# Altium PCB HIGROTERM1.PcbDoc
Units mil, origin at the board's own origin, x right, y up, seen from the top; angles counter-clockwise.
Board outline 6000 x 4000 mil, 2 copper layers (Top Layer, Bottom Layer); 30 components, 39 nets, 138 pads, 37 vias.
Unrouted connection lines stored in the file: 37.
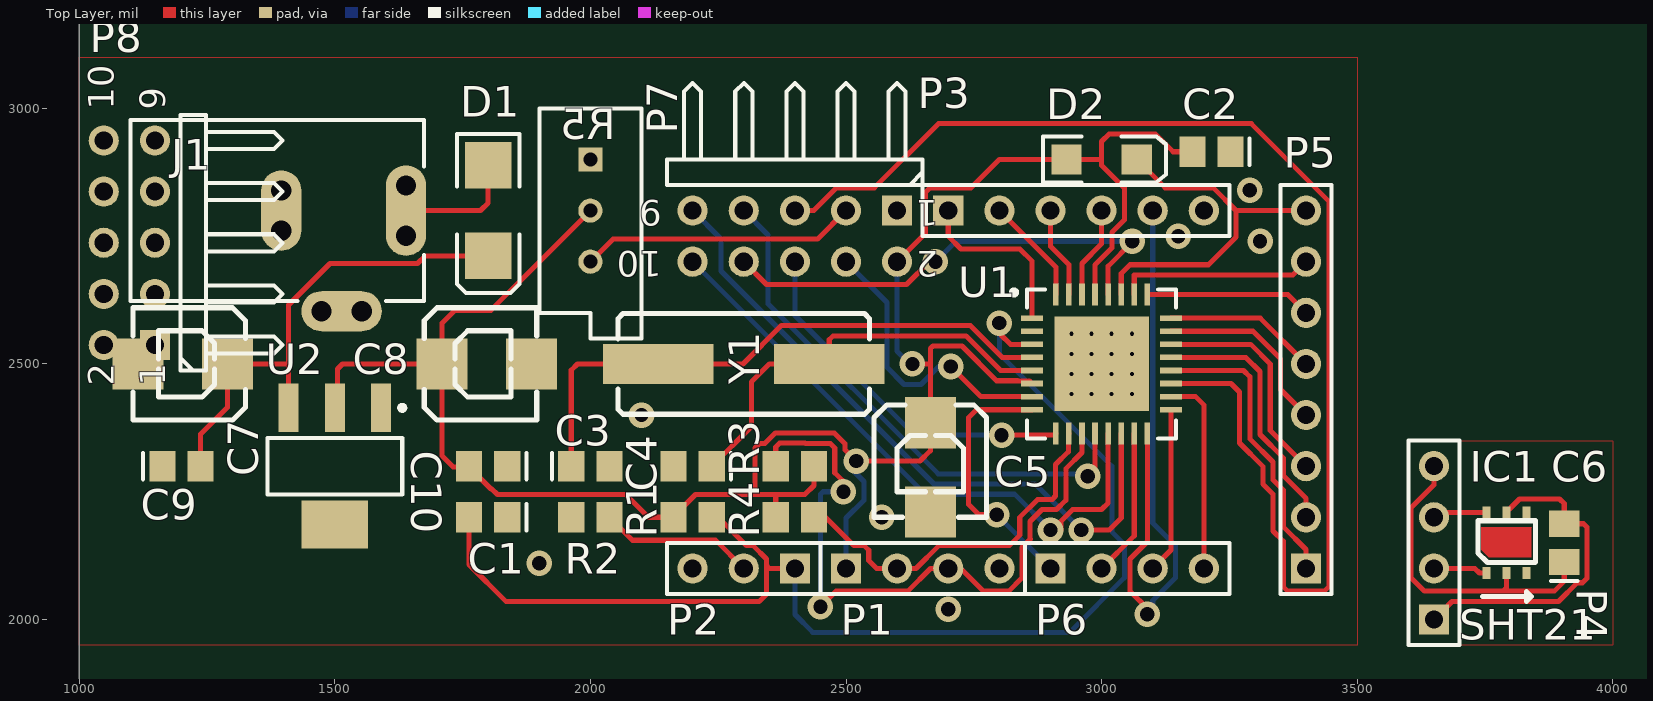
[diagram p0: Top Layer view]
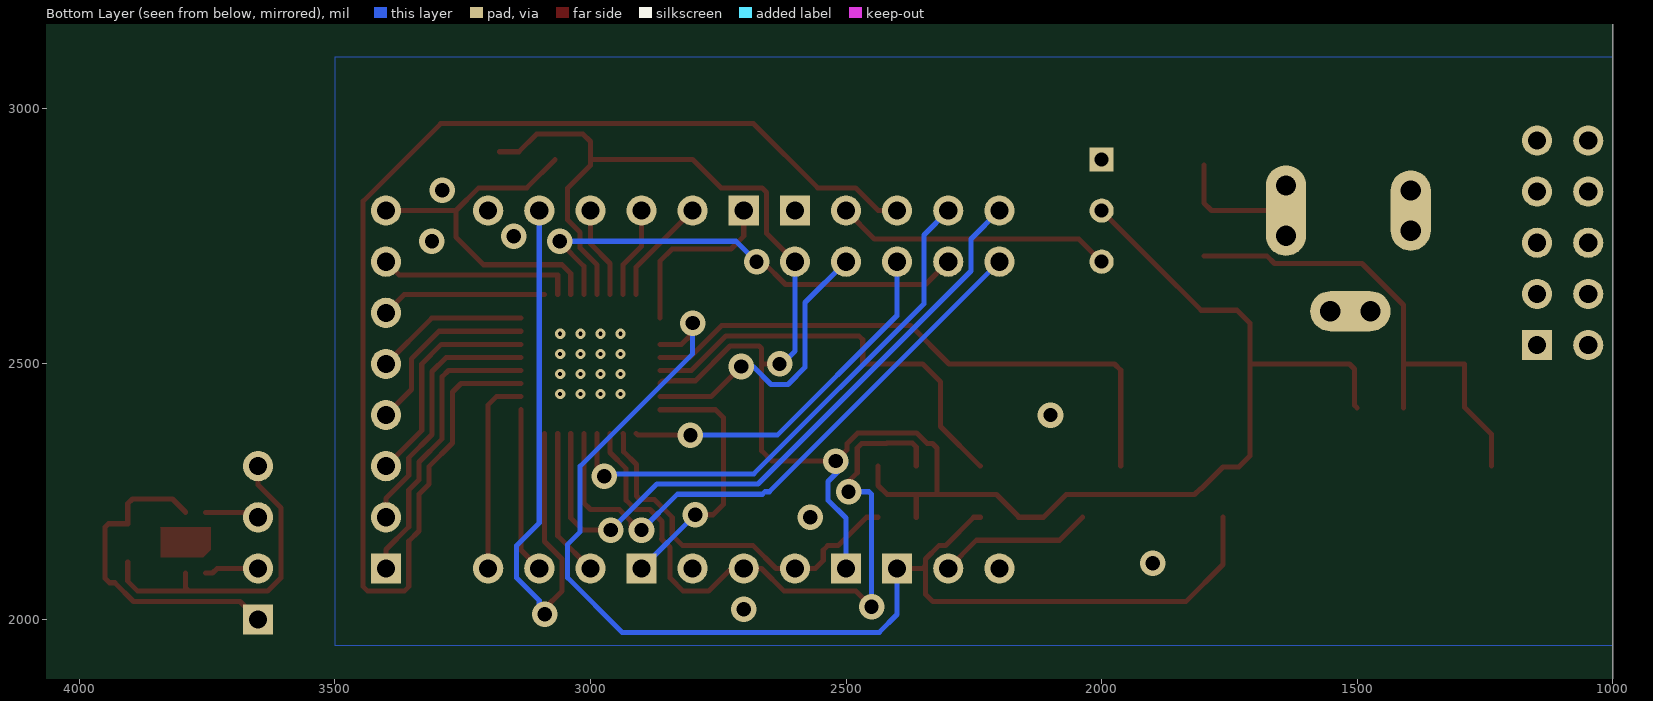
[diagram p1: Bottom Layer view, seen from below]

## Layer stack, top to bottom
Top Layer: signal copper 1.4
Dielectric: dielectric 12.6, FR-4, Dk 4.8
Bottom Layer: signal copper 1.4

## Board outline
1000,1000 7000,1000 7000,5000 1000,5000

## Design rules (kind name [scope] priority, off if disabled: settings)
Clearance [All] p1: gap=10
PolygonConnect [All] p1: connectstyle=Relief reliefconductorwidth=10 reliefentries=4 polygonreliefangle="90 Angle"
RoomDefinition SHT-BREAD [InComponentClass('SHT-BREAD')] p1: confinementstyle=ConfineIn formatcopy=TRUE lockcomponents=FALSE outline 3600,1950 4000,1950 4000,2350 3600,2350
RoomDefinition HIGROTERM [InComponentClass('HIGROTERM')] p2: confinementstyle=ConfineIn formatcopy=TRUE lockcomponents=FALSE outline 1000,1950 3500,1950 3500,3100 1000,3100
RoutingVias [All] p1: holewidth=28 width=50 viastyle="Through Hole" minholewidth=28 minwidth=50 maxholewidth=28 maxwidth=50
SilkscreenOverComponentPads [All] p1: minsilkscreentomaskgap=10
SolderMaskExpansion [All] p1: expansion=4
Width [All] p1: maxlimit=10 minlimit=10 preferedwidth=10
27 further rules are at their usual default settings.

## Classes and differential pairs
component class SHT-BREAD: C6 IC1 P4
component class HIGROTERM: C1 C2 C3 C4 C5 C7 C8 C9 C10 D1 D2 J1 P1 P2 P3 P5 P6 P7 P8 R1 R2 R3 R4 R5 U1 U2 Y1

## Components (designator, comment, footprint, x,y, rotation, side; value= is the part's Value field where it differs from the comment)
C1 "C0805" 0805 1800,2200 r180 top
C2 "0805" 0805 3215,2915 r180 top
C3 "C0805" 0805 2000,2300 r0 top
C4 "C0805" 0805 2200,2300 r180 top
C5 "EKE00BA210L00" SMD-CPOL 2665,2295 r0 top
C6 "C0805" 0805 3905,2150 r90 top
C7 "EKE00BA210L00" SMD-CPOL 1200,2500 r270 top
C8 "EKE00BA210L00" SMD-CPOL 1800,2500 r90 top
C9 "C0805" 0805 1200,2300 r0 top
C10 "C0805" 0805 1800,2300 r180 top
D1 "D Schottky" SMB 1800,2800 r270 top
D2 "LED2" 3.2X1.6X1.1 3000,2900 r0 top
IC1 "SHT21" PCBComponent_1 3800,2150 r270 top
J1 "PWR2.5" KLD-0202 1100,2800 r0 top
P1 "Header 4" HDR1X4 2500,2100 r0 top
P2 "Header 3" HDR1X3 2400,2100 r180 top
P3 "Header 6" HDR1X6 2700,2800 r0 top
P4 "Header 4" HDR1X4 3650,2000 r90 top
P5 "Header 8" HDR1X8 3400,2100 r90 top
P6 "Header 4" HDR1X4 2900,2100 r0 top
P7 "Header 5X2H" HDR2X5H 2600,2800 r180 top
P8 "Header 5X2H" HDR2X5H 1147.98,2537.02 r90 top
R1 "1K" 6-0805 2200,2200 r180 top
R2 "1K" 6-0805 2000,2200 r0 top
R3 "Res3" 6-0805 2400,2300 r0 top
R4 "Res3" 6-0805 2400,2200 r180 top
R5 "RPot" VR5 2000,2800 r270 top
U1 "LPC1114FHN33/301" SOT865-3_V 3000,2500 r0 top
U2 "LM1117MPX-3.3/NOPB" MP04A_N 1500,2300 r270 top
Y1 "XTAL" XTAL-HC497 2300,2500 r270 top

## Footprints (in the part's own frame and the unit in brackets; to place one, negate y for a bottom-side part, rotate by r counter-clockwise, add the part's x,y. Pads: shape width x height; smd on the part's side, far side on the other; paste and mask are expansions set on the pad)
3.2X1.6X1.1 [mm] "SMT LED; 2 Flat Leads"
  rect 1.5x1.5 smd: 1(-1.75,0) 2(1.75,0)
  silkscreen extent -2.9,-1.15 3.2,1.15
6-0805 [mm] "Chip Resistor; Body 2 x 1.2 mm (LxW typ)"
  rect 1.3x1.5 smd: 1(-0.95,0) 2(0.95,0)
0805 [mm] "Chip Capacitor; Body 2.0 x 1.2 mm (LxW typ)"
  rect 1.3x1.5 smd: 1(-0.95,0) 2(0.95,0)
  silkscreen extent -1.9,-0.65 -1.9,0.65
HDR1X3 [mm] "Connector; Header; 3 Position"
  rect 1.5x1.5 hole 0.9: 1(0,0)
  round 1.5 hole 0.9: 2(2.54,0) 3(5.08,0)
  silkscreen extent -1.27,-1.27 6.35,1.27
HDR1X4 [mm] "Connector; Header; 4 Position"
  rect 1.5x1.5 hole 0.9: 1(0,0)
  round 1.5 hole 0.9: 2(2.54,0) 3(5.08,0) 4(7.62,0)
  silkscreen extent -1.27,-1.27 8.89,1.27
HDR1X6 [mm] "Connector; Header; 6 Position"
  rect 1.5x1.5 hole 0.9: 1(0,0)
  round 1.5 hole 0.9: 2(2.54,0) 3(5.08,0) 4(7.62,0) 5(10.16,0) 6(12.7,0)
  silkscreen extent -1.27,-1.27 13.97,1.27
HDR1X8 [mm] "Connector; Header; 8 Position"
  rect 1.5x1.5 hole 0.9: 1(0,0)
  round 1.5 hole 0.9: 2(2.54,0) 3(5.08,0) 4(7.62,0) 5(10.16,0) 6(12.7,0) 7(15.24,0) 8(17.78,0)
  silkscreen extent -1.27,-1.27 19.05,1.27
HDR2X5H [mm] "Connector; Header; 5x2 Position; Right Angle"
  rect 1.5x1.5 hole 0.9: 1(0,0)
  round 1.5 hole 0.9: 2(0,2.54) 3(2.54,0) 4(2.54,2.54) 5(5.08,0) 6(5.08,2.54) 7(7.62,0) 8(7.62,2.54) 9(10.16,0) 10(10.16,2.54)
  silkscreen extent -1.27,-6.35 11.43,-1.27
KLD-0202 [mm] "DC Power Jack, 2.5mm, KLD Series, PCB Mount"
  oval 2x4.5 all layers, no hole: 1(13.7,0)
  round 1.5 hole 1: 1A(13.7,-1.25) 1B(13.7,1.25) 2A(7.5,-1) 2B(7.5,1) 3A(9.5,-5) 3B(11.5,-5)
  oval 2x4 all layers, no hole: 2(7.5,0)
  oval 4x2 all layers, no hole: 3(10.5,-5)
  silkscreen extent 0,-4.5 14.6,4.5
MP04A_N [mm] "SOT223, 4-Leads, Body 6.5x3.5mm, Pitch 2.3mm, Lead Span 7mm, IPC Medium Density"
  rect 2.4x1 smd: 1(-2.9,2.3) 2(-2.9,0) 3(-2.9,-2.3)
  rect 2.4x3.3 smd: 4(2.9,0)
  silkscreen extent -3.02,-3.35 1.4,3.48, body extent -1.86,-3.35 1.86,3.35, height 1.8
PCBComponent_1 [mm]
  rect 0.6x0.4 smd: 1(1.5,-1.2) 2(1.5,-0.2) 3(1.5,0.8) 4(-1.5,0.8) 5(-1.5,-0.2) 6(-1.5,-1.2)
  Top Layer region: -0.775,-1.463 0.35,-1.463 0.725,-1.088 0.725,1.037 -0.75,1.037 -0.775,1.062
  silkscreen extent -1.1,-1.63 2.9,1.25
SMB [mm] "DO-214-AA/SMB; 2 C-Bend Leads; Body 5.3 x 3.6 mm, inc. leads (LxW)"
  rect 2.3x2.3 smd: 1(-2.25,0) 2(2.25,0)
  silkscreen extent -3.8,-1.55 4.1,1.55
SMD-CPOL [mil]
  rect 100x100 smd: 1(0,90) 2(0,-85)
  silkscreen extent -110,-95 110,125
SOT865-3_V [mm] "QFN, 32-Leads, Body 7x7mm, Pitch 0.65mm, Thermal Pad 4.7x4.7mm, NXP Recommended"
  rect 1.1x0.28 smd: 1(-3.45,2.275) 2(-3.45,1.625) 3(-3.45,0.975) 4(-3.45,0.325) 5(-3.45,-0.325) 6(-3.45,-0.975) 7(-3.45,-1.625) 8(-3.45,-2.275) 17(3.45,-2.275) 18(3.45,-1.625) 19(3.45,-0.975) 20(3.45,-0.325) 21(3.45,0.325) 22(3.45,0.975) 23(3.45,1.625) 24(3.45,2.275)
  rect 0.28x1.1 smd: 9(-2.275,-3.45) 10(-1.625,-3.45) 11(-0.975,-3.45) 12(-0.325,-3.45) 13(0.325,-3.45) 14(0.975,-3.45) 15(1.625,-3.45) 16(2.275,-3.45) 25(2.275,3.45) 26(1.625,3.45) 27(0.975,3.45) 28(0.325,3.45) 29(-0.325,3.45) 30(-0.975,3.45) 31(-1.625,3.45) 32(-2.275,3.45)
  rect 4.7x4.7 smd paste-2.35: 33(0,0)
  silkscreen extent -4.47,-3.7 3.7,3.7, body extent -3.55,-3.55 3.55,3.55, height 1
VR5 [mm] "Thru-Hole; 3 Leads"
  rect 1.2x1.2 hole 0.7: 1(-2.54,0)
  round 1.2 hole 0.7: 2(0,0) 3(2.54,0)
  silkscreen extent -5.08,-2.54 6.35,2.54
XTAL-HC497 [mm]
  rect 2x5.5 smd: 1(0,4.25) 2(0,-4.25)
  silkscreen extent -2.5,-6.25 2.5,6.25

## Part data
C1 C3 C4 C6 C9 C10: "Ceramic Chip Capacitor - Standard"
C2: library part C0805, "Ceramic Chip Capacitor - Standard"
C5 C7 C8: "Aluminum Electrolytic Capacitor, Radial Style with Long Leads: 10uF, 100V"
D1: "Schottky Diode"
D2: "Typical RED, GREEN, YELLOW, AMBER GaAs LED"
J1: "Low Voltage Power Supply Connector"
P1 P4 P6: "Header, 4-Pin"
P2: "Header, 3-Pin"
P3: "Header, 6-Pin"
P5: "Header, 8-Pin"
P7 P8: "Header, 5-Pin, Dual row, Right Angle"
R1 R2: library part ERQF06, "Flat Chip Fuse Resistor, 0.47 Ohm to 10 Ohm Range, 5% Tolerance, 0805 Size, 0.1 W"
R3 R4: "Resistor"
R5: "Potentiometer"
U1: "32-bit ARM Cortex-M0 MCU, LPC1100 Series, 32 kB Flash, 8 kB SRAM, 1 SPI, ADC, 32-Pin HVQFN"
U2: "800mA Low-Dropout Linear Regulator, 4-pin SOT-223, Pb-Free"
Y1: "Crystal Oscillator"

## Via types
v1: diameter 50, hole 28, Top Layer to Bottom Layer, 21 vias
v2: diameter 19.68, hole 7.87, Top Layer to Bottom Layer, 16 vias

## Nets (pads, with @x,y where several pads share a name; then routed paths per layer and width w, separated by ;. In a path a pad name is that pad's centre, name@x,y a point inside that pad or via, vN(x,y) a via of type N, cw(c..) or ccw(c..) an arc to the next point about the centre after c; other vN are vias at no path point)
AD0: P5.2 U1.21 | length 508
  Top Layer w10: U1.21 3282.2,2512.8 3310,2485 3310,2361.72 3355.47,2316.24 3355.47,2281.56 3400,2237.03 P5.2
AD1: P5.3 U1.22 | length 439.1
  Top Layer w10: U1.22 3291.61,2538.39 3330,2500 3330,2370 P5.3
AD2: P5.4 U1.23 | length 367.2
  Top Layer w10: U1.23 3296.02,2563.98 3350,2510 3350,2450 P5.4
AD3: P5.5 U1.24 | length 301.3
  Top Layer w10: U1.24 3310.43,2589.57 P5.5
AD4: P5.6 P8.2 U1.25 | length 325.3
  Top Layer w10: U1.25 3364.17,2635.83 P5.6
AD5: P5.7 U1.26 | length 385
  Top Layer w10: U1.26 3063.98,2673.98 3373.98,2673.98 P5.7
AD6: P5.1 U1.20 | length 579.8
  Top Layer w10: U1.20 3277.8,2487.2 3290,2475 3290,2353.43 3335.47,2307.96 3335.47,2273.27 3355.47,2253.27 3355.47,2181.56 3400,2137.03 P5.1
AD7: D2.2 P5.8 U1.27 | length 719.5
  Top Layer w10: U1.27 3038.39,2676.67 3055.69,2693.98 3208.98,2693.98 3262.97,2747.97 3262.97,2800 ; D2.2 3124.37,2844.53 3218.44,2844.53 3262.97,2800 ; P5.8 3262.97,2800
CTS: P3.5 U1.16 | length 1212.8
  Top Layer w10: v1(3089.57,2010.43) 3089.57,2021.38 3055.47,2055.47 3055.47,2118.44 3089.57,2152.54 U1.16
  Bottom Layer w10: v1(3089.57,2010.43) 3100,2020.87 3100,2037.03 3144.53,2081.56 3144.53,2144.53 3100,2189.06 P3.5
DB4: P7.7 U1.12 | length 1068.8
  Top Layer w10: v1(2972.8,2280) 2975,2277.8 2987.2,2290 U1.12
  Bottom Layer w10: P7.7 2347.66,2752.34 2347.66,2617.66 2680.31,2285 v1@2972.8,2285 ; v1(2972.8,2280) 2975,2280 v1@2980,2285
DB5: P7.8 U1.28 | length 937.2
  Top Layer w10: P7.8 2344.53,2655.47 2618.44,2655.47 2662.97,2700 v1(2675,2700) ; U1.28 3012.8,2691.23 3060,2738.43 v1(3060,2740)
  Bottom Layer w10: v1(2675,2700) 2715,2740 v1(3060,2740)
DB6: P7.9 U1.13 | length 1198.2
  Top Layer w10: v1(2900,2175) 2920,2175 2920,2191.57 2943.43,2215 3000,2215 3012.8,2227.8 U1.13
  Bottom Layer w10: 2200,2700 2650,2250 2658.74,2250 2663.74,2245 2830,2245 v1(2900,2175)
DB7: P7.10 U1.14 | length 1309.6
  Top Layer w10: v1(2960,2175) 3015,2175 3038.39,2198.39 U1.14
  Bottom Layer w10: 2200,2800 2255.47,2744.53 2255.47,2681.56 2672.03,2265 2870,2265 v1(2960,2175)
DTR: P3.1 U1.1 | length 345.8
  Top Layer w10: P3.1 2700,2750 2725,2725 2840,2725 2864.17,2700.83 U1.1
E: P7.6 U1.7 | length 576.7
  Top Layer w10: v1(2705,2495) 2763.98,2436.02 U1.7
  Bottom Layer w10: 2500,2700 2580,2620 2580,2493.43 2613.43,2460 2646.57,2460 2681.57,2495 v1(2705,2495)
GND: C1.1 C2.1 C3.2 C4.2 C5.2 C7.2 C8.2 C9.1 C10.1 J1.2 J1.2A J1.2B J1.3 J1.3A J1.3B P1.4 P3.6 P7.1 P8.3 P8.5 P8.9 R2.1 R5.1 U1.33 U2.1
  other v1: 2700,2020 1900,2110 2570,2200 2100,2400 3310,2740 3150,2750 3290,2840
  other v2: 2940.94,2440.94 2980.32,2440.94 3019.68,2440.94 3059.06,2440.94 2940.94,2480.32 2980.32,2480.32 3019.68,2480.32 3059.06,2480.32 2940.94,2519.68 2980.32,2519.68 3019.68,2519.68 3059.06,2519.68 2940.94,2559.06 2980.32,2559.06 3019.68,2559.06 3059.06,2559.06
ISP: C1.2 P2.1 R1.1 U1.3 | length 2464
  Top Layer w10: C1.2 1762.6,2107.6 1835.2,2035 2330,2035 2344.53,2049.53 2344.53,2105.47 ; R1.1 2250,2200 2305.47,2144.53 2318.44,2144.53 2344.53,2118.44 2344.53,2105.47 ; P2.1 2350,2100 2344.53,2105.47 ; v1(2800,2580) 2803.28,2576.72 2803.28,2556.72 2821.61,2538.39 U1.3
  Bottom Layer w10: P2.1 2400,2010 2435,1975 2937.97,1975 3044.53,2081.56 3044.53,2147.04 3020,2171.57 3020,2300 2800,2520 v1(2800,2580)
MISO: P6.3 U1.17 | length 325.3
  Top Layer w10: P6.3 3135.83,2135.83 U1.17
MOSI: P6.4 P8.6 U1.18 | length 390.8
  Top Layer w10: U1.18 3183.98,2436.02 3200,2420 P6.4
NetC3_1: C3.1 U1.4 Y1.2 | length 1151.1
  Top Layer w10: C3.1 1962.6,2487.6 1975,2500 Y1.2 2298.47,2500 2373.47,2575 2743.28,2575 2805.49,2512.8 U1.4
NetC4_1: C4.1 U1.5 Y1.1 | length 839.4
  Top Layer w10: C4.1 2315,2377.6 2315,2465 2350,2500 Y1.1 2467.32,2547.32 2475,2555 2735,2555 2802.8,2487.2 U1.5
NetC6_1: C6.1 IC1.2 P4.4 | length 631.1
  Top Layer w10: P4.4 3650,2262.97 3605.47,2218.44 3605.47,2081.56 3631.56,2055.47 3785.47,2055.47 ; IC1.2 3792.13,2062.13 3785.47,2055.47 ; C6.1 3905,2075 3885.47,2055.47 3785.47,2055.47
NetC6_2: C6.2 IC1.5 P4.1 | length 648.1
  Top Layer w10: P4.1 3685.47,2035.47 3893.76,2035.47 3930.29,2072.01 3940.74,2072.01 3949.53,2080.79 3949.53,2180.47 3942.6,2187.4 C6.2 3905,2226.73 3895.87,2235.87 3817.41,2235.87 3792.13,2210.58 IC1.5
NetC7_1: C7.1 C9.2 D1.2 U2.3 | length 972.8
  Top Layer w10: C9.2 1237.4,2362.6 1290,2415.2 C7.1 1409.45,2500 ; U2.3 1409.45,2500 ; D1.2 1676.89,2711.42 1661.89,2696.42 1490.39,2696.42 1409.45,2615.47 1409.45,2500
NetD1_1: D1.1 J1.1 J1.1A J1.1B | length 240.4
  Top Layer w10: J1.1 1785,2800 1800,2815 D1.1
NetIC1_1: IC1.1 P4.2 | length 106.5
  Top Layer w10: P4.2 3730,2100 3739.06,2090.94 IC1.1
NetIC1_6: IC1.6 P4.3 | length 106.5
  Top Layer w10: P4.3 3659.06,2209.06 IC1.6
NetP2_2: P2.2 R2.2 | length 304
  Top Layer w10: R2.2 2082.4,2155 2245,2155 P2.2
NetP7_3: P7.3 R5.3 | length 541.4
  Top Layer w10: R5.3 2044.53,2744.53 2444.53,2744.53 P7.3
R/W: P7.5 P8.4 U1.19 | length 2585.4
  Top Layer w10: P7.5 2437.03,2800 2481.56,2844.53 2555.47,2844.53 2680.94,2970 3292.97,2970 3444.53,2818.44 3444.53,2064.26 3435.74,2055.47 3364.26,2055.47 3355.47,2064.26 3355.47,2153.27 3335.47,2173.27 3335.47,2244.99 3315.47,2264.99 3315.47,2299.68 3270,2345.15 3270,2445 3253.39,2461.61 U1.19
RESET: C2.2 C5.1 C8.1 C10.2 D2.1 P1.1 P7.2 P8.1 P8.10 R1.2 R3.2 R4.2 R5.2 U1.2 U1.6 U1.29 U2.2 | length 4308.3
  Top Layer w10: U2.2 1505,2419.17 1505,2490 1515,2500 C8.1 ; R5.2 2000,2799.65 1851.49,2651.14 1851.14,2651.14 1805,2605 1735,2605 1710,2580 C8.1 ; R4.2 2362.6,2241.93 2360,2244.53 ; R3.2 2437.4,2262.4 2419.53,2244.53 2360,2244.53 ; P7.2 2655.47,2755.47 2655.47,2835.74 2664.26,2844.53 2744.53,2844.53 2800,2900 D2.1 3000,2900 ; v1(2630,2500) 2665,2500 ; U1.6 2859.09,2466.69 2836.31,2466.69 2835.79,2467.2 2794.51,2467.2 2726.72,2535 2670,2535 2665,2530 2665,2500 ; U1.29 2987.2,2693.92 3020,2726.72 3020,2757.03 3044.53,2781.56 3044.53,2844.1 3000,2888.63 3000,2900 ; C2.2 3140,2915 3105,2950 3015,2950 3000,2935 3000,2900 ; C8.1 1710,2320 1731.53,2298.47 1762.6,2298.47 1805.6,2255.47 1807.13,2255.47 1818.07,2244.53 2069.21,2244.53 2113.73,2200 R1.2 2162.6,2201.53 2205.6,2244.53 2320,2244.53 ; 2320,2244.53 2360,2244.53 ; 2320,2244.53 2322.01,2246.54 2322.01,2335.74 2330.79,2344.53 2341.24,2344.53 2361.72,2365 2477.02,2365 2497.99,2344.03 2497.99,2332.01 v1(2520,2310) 2645,2310 2665,2330 C5.1 2665,2500
  Bottom Layer w10: P1.1 2500,2198.43 2535,2233.43 2535,2270 2500,2305 2505,2310 v1(2520,2310) ; P7.2 2600,2525 2625,2500 v1(2630,2500)
RS: P7.4 U1.9 | length 714.7
  Top Layer w10: v1(2804.3,2360.7) 2906.96,2360.7 U1.9
  Bottom Layer w10: 2400,2700 2400,2593.6 2401.4,2593.6 2634.3,2360.7 v1(2804.3,2360.7)
RTS: P3.4 U1.30 | length 180.1
  Top Layer w10: U1.30 2961.61,2696.61 3000,2735 P3.4
RXD: P3.3 U1.31 | length 179.1
  Top Layer w10: P3.3 2900,2730 2936.02,2693.98 U1.31
SCK0: P6.2 U1.15 | length 290.7
  Top Layer w10: P6.2 3063.98,2163.98 U1.15
SCL: P1.2 R4.1 U1.10 | length 738.3
  Top Layer w10: R4.1 2460,2200 2515.47,2144.53 2535.74,2144.53 2544.53,2135.74 2544.53,2115.47 2560,2100 P1.2 2637.03,2100 2681.56,2144.53 2819.53,2144.53 2840,2165 2840,2199.85 2875.15,2235 2903.43,2235 2910,2241.57 2910,2303.28 2935,2328.28 2935,2363.15 U1.10
SDA: P1.3 R3.1 U1.11 | length 1331.3
  Top Layer w10: R3.1 2362.6,2337.6 2370,2345 2420,2345 2420.47,2344.53 2469.21,2344.53 2477.99,2335.74 2477.99,2287.01 2505,2260 v1(2495,2250) ; v1(2450,2025) 2480.47,2055.47 2620.79,2055.47 2665.31,2100 P1.3 2724.53,2100 2769.06,2055.47 2818.44,2055.47 2844.53,2081.56 2844.53,2141.24 2860.86,2157.57 2860,2158.43 2860,2191.57 2883.43,2215 2911.72,2215 2930,2233.28 2930,2295 2961.61,2326.61 U1.11
  Bottom Layer w10: v1(2450,2025) 2450,2245 2455,2250 v1(2495,2250)
SSEL0: P6.1 U1.8 | length 512.3
  Top Layer w10: v1(2795,2205) 2760,2205 2740,2225 2740,2395 2755.43,2410.43 U1.8
  Bottom Layer w10: v1(2795,2205) P6.1
TXD: P3.2 U1.32 | length 209.9
  Top Layer w10: P3.2 2910.43,2689.57 U1.32
pads on no net: IC1.3 IC1.4 P2.3 P8.7 P8.8 U2.4

## Polygon pours and split planes (outlines as drawn)
GND on Bottom Layer "Top Layer-No Net" (solid, shelved, pour order 12): 1000,3100 3500,3100 3500,1950 1000,1950
GND on Top Layer "Top Layer-No Net" (solid, shelved, pour order 14): 3600,2350 4000,2350 4000,1950 3600,1950
GND on Top Layer "Top Layer-No Net" (solid, shelved, pour order 10): 1000,3100 3500,3100 3500,1950 1000,1950

## Text inside footprints (layer, text, board x,y; h text height)
J1: Mechanical 1 "Mech 2 - Clearance, move to internal plane if present" at 1111.26,2999.44 h11.81; Mechanical 1 "Mech 1 - Slot cut-out" at 1111.26,3019.13 h11.81; Mechanical 1 "Assign keep-out area to slot" at 1111.26,3058.5 h11.81; Mechanical 1 "Alert PCB fab to slot details" at 1111.26,3038.82 h11.81
P7: Top Overlay "10" at 2140,2720 h50 r180; Top Overlay "9" at 2140,2820 h50 r180; Top Overlay "1" at 2680,2820 h50 r180; Top Overlay "2" at 2680,2720 h50 r180
P8: Top Overlay "10" at 1067.98,2997.02 h50 r90; Top Overlay "9" at 1167.98,2997.02 h50 r90; Top Overlay "1" at 1167.98,2457.02 h50 r90; Top Overlay "2" at 1067.98,2457.02 h50 r90